# EAGLE board Tx_328p (EAGLE 7.2.0)
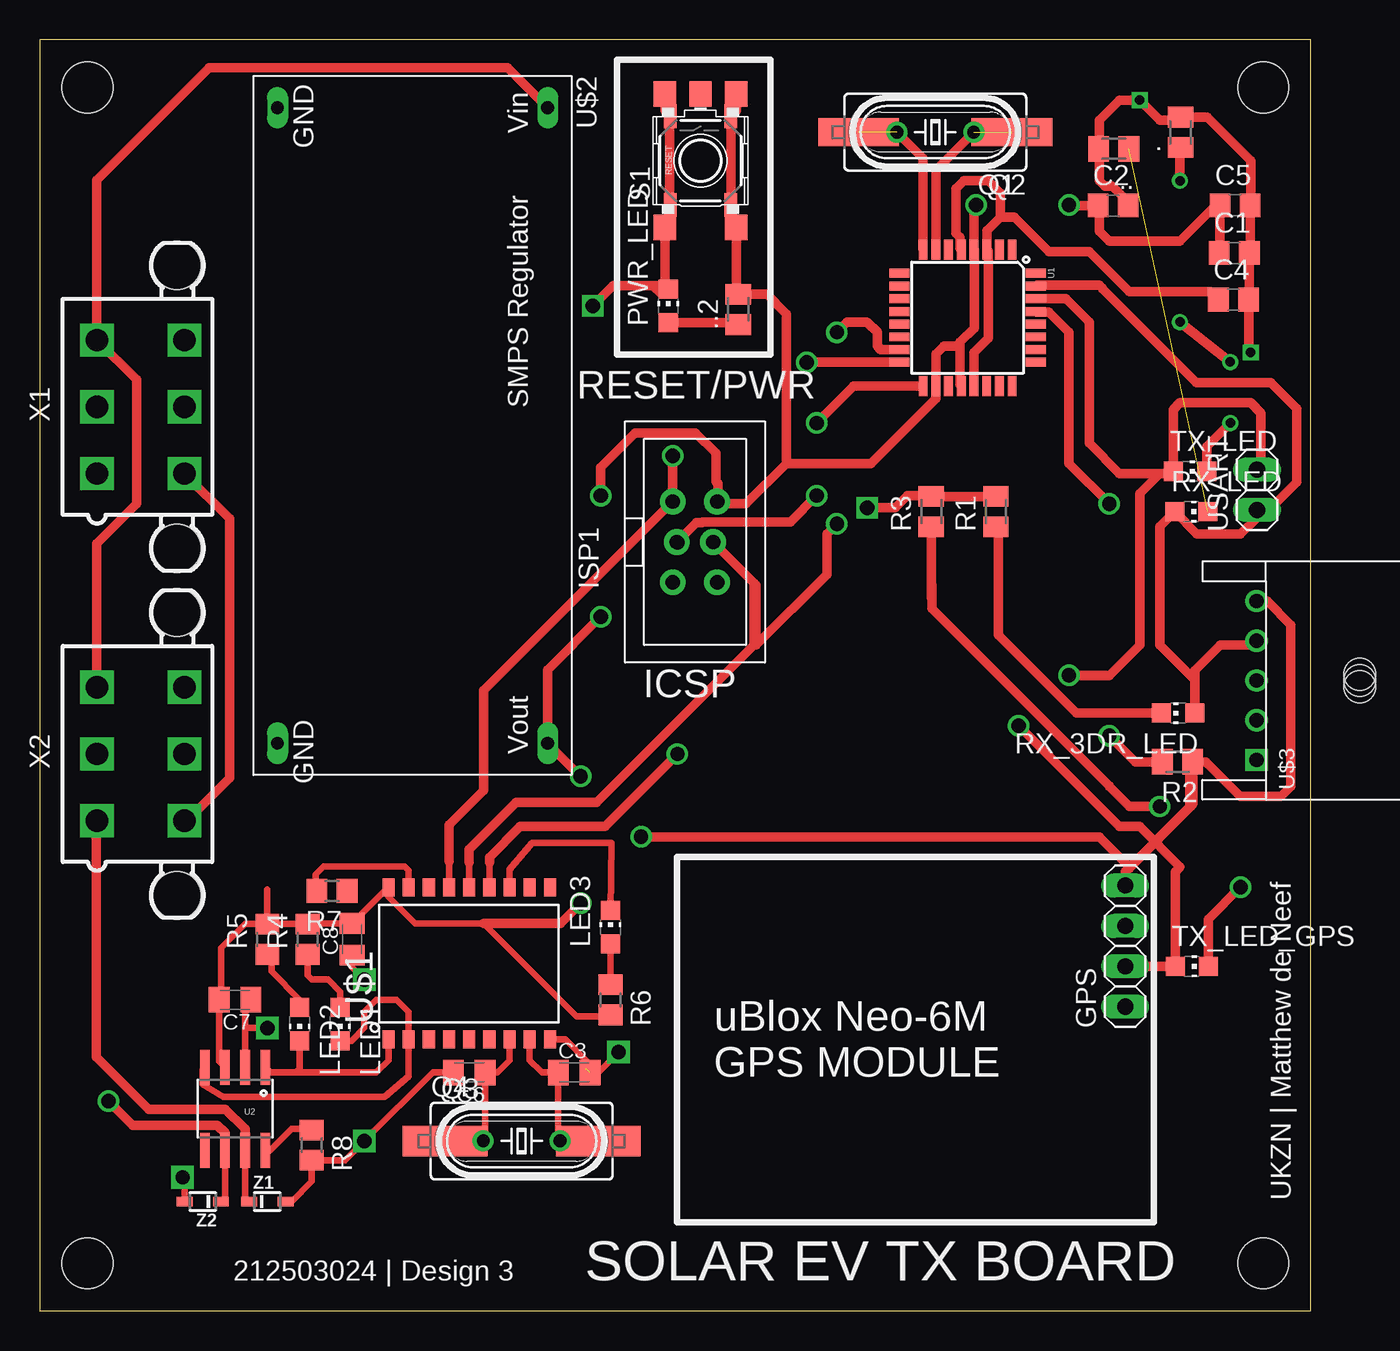
[diagram p0: board, top side]
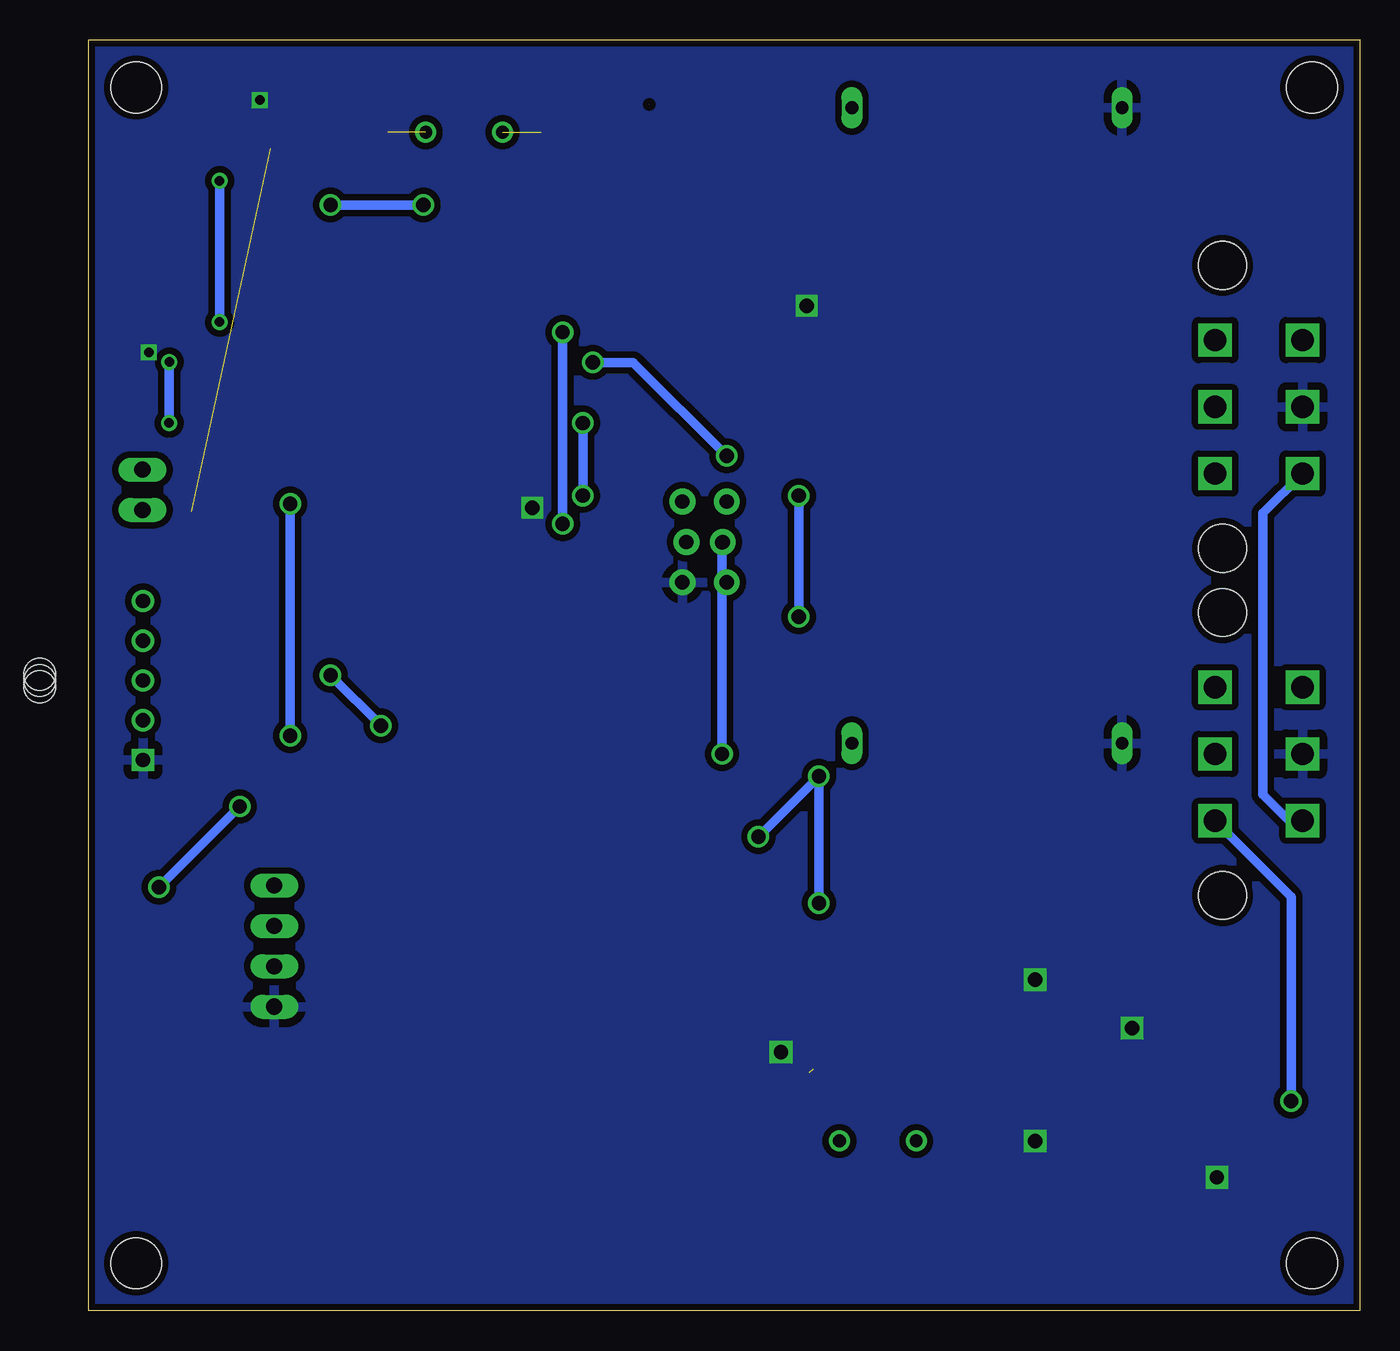
[diagram p1: board, bottom side, seen from below]

Size 80 x 80 mm. Coordinates in mm from the lower left corner, seen from the top.
Outline: 44.72,75.93 44.72,75.93
Outline: 0,0 80,0 80,80 0,80 0,0
Copper layers (1*16): Top 0.035mm / dielectric 1.5mm / Bottom 0.035mm
Design rules "Bens_PCB_SERVICE": minimum track width 16mil, minimum drill 24mil, track to track 10mil, track to pad 12mil, pad to pad 12mil, via to via 10mil, smd to smd 12mil, copper to edge 10mil, drill to drill 10mil, minimum pad ring 10mil, minimum via ring 8mil, stop-mask expansion 4mil, vias tented up to drill 0mil, thermal gap 20mil
Holes 3.2 mm at 3,3 77,3 77,77 3,77

## Footprints (pad centres in the part's own frame; a part is rotated, then mirrored left to right if it is on the bottom)
M0805 = smd 1.3 x 1.6: 1 -0.95,0; 2 0.95,0
C0805 = smd 1.3 x 1.5: 1 -0.95,0; 2 0.95,0
C0805K = smd 1.3 x 1.6: 1 -1,0; 2 1,0
1X04 = drill 1.016 long: 1 -3.81,0; 2 -1.27,0; 3 1.27,0; 4 3.81,0
AVRISP-BOX = drill 0.9 pad 1.626: 1 -1.397,2.54; 2 1.397,2.54; 3 -1.143,0; 4 1.143,0; 5 -1.397,-2.54; 6 1.397,-2.54
CHIP-LED0805 = smd 1.2 x 1.2: A 0,-1.05; C 0,1.05
HC49/S = drill 0.813: 1 -2.413,0; 2 2.413,0
SM49 = smd 5.08 x 1.778: 1 -4.826,0; 2 4.826,0
HC49UP = smd 5.334 x 1.93: 1 -4.826,0; 2 4.826,0
R0805 = smd 1.3 x 1.5: 1 -0.95,0; 2 0.95,0
TACTILE-SWITCH-SMD = smd 1.524 x 0.762: 1 -2.794,1.905; 2 2.794,1.905; 3 -2.794,-1.905; 4 2.794,-1.905
SKHMPXE010 = smd 1.6 x 1.4: 1 -4.2,2.25; 2 4.2,2.25; 3 -4.2,-2.25; 4 4.2,-2.25; 5 4.2,0
TQFP32-08 = smd 1.27 x 0.559: 1 -4.293,2.8; 2 -4.293,2; 3 -4.293,1.2; 4 -4.293,0.4; 5 -4.293,-0.4; 6 -4.293,-1.2; 7 -4.293,-2; 8 -4.293,-2.8; 17 4.293,-2.8; 18 4.293,-2; 19 4.293,-1.2; 20 4.293,-0.4; 21 4.293,0.4; 22 4.293,1.2; 23 4.293,2; 24 4.293,2.8 | smd 0.559 x 1.27: 9 -2.8,-4.293; 10 -2,-4.293; 11 -1.2,-4.293; 12 -0.4,-4.293; 13 0.4,-4.293; 14 1.2,-4.293; 15 2,-4.293; 16 2.8,-4.293; 25 2.8,4.293; 26 2,4.293; 27 1.2,4.293; 28 0.4,4.293; 29 -0.4,4.293; 30 -1.2,4.293; 31 -2,4.293; 32 -2.8,4.293
SO08 = smd 0.61 x 2.21: 1 -1.905,-2.616; 2 -0.635,-2.616; 3 0.635,-2.616; 4 1.905,-2.616; 5 1.905,2.616; 6 0.635,2.616; 7 -0.635,2.616; 8 -1.905,2.616
SO-18W = smd 0.762 x 1.143: 1 -5.08,-4.788; 2 -3.81,-4.788; 3 -2.54,-4.788; 4 -1.27,-4.788; 5 0,-4.788; 6 1.27,-4.788; 7 2.54,-4.788; 8 3.81,-4.788; 9 5.08,-4.788; 10 5.08,4.788; 11 3.81,4.788; 12 2.54,4.788; 13 1.27,4.788; 14 0,4.788; 15 -1.27,4.788; 16 -2.54,4.788; 17 -3.81,4.788; 18 -5.08,4.788
SMPSBOARD = drill 0.8 long: GND 2,1.5; GND@ 42,1.5; VIN 2,18.5; VOUT 42,18.5
1744426-5 = drill 0.9 square: P$1 -5,6.5 | drill 0.9: P$2 -2.5,6.5; P$3 0,6.5; P$4 2.5,6.5; P$5 5,6.5 | hole 2: 0,0; -0.4,0; 0.4,0
1X02 = drill 1.016 long: 1 -1.27,0; 2 1.27,0
5566-6 = drill 1.4 square: 1 4.2,-2.75; 2 0,-2.75; 3 -4.2,-2.75; 4 4.2,2.75; 5 0,2.75; 6 -4.2,2.75 | hole 3: 8.9,2.29; -8.9,2.29
SOD323 = smd 1 x 0.6: A 1.143,0; C -1.143,0

## Placement (x,y rotation side)
.  1k  [M0805]  71.8,74.17 90 top
..  1k  [M0805]  67.59,73.14 180 top
..2  1k  [M0805]  43.96,63.02 90 top
C1  0.1uF  [C0805]  75.17,66.58 0 top
C2  0.1uF  [C0805]  67.55,69.57 0 top
C3  22pF  [C0805K]  33.63,15.01 0 top
C4  0.1uF  [C0805]  75.12,63.63 0 top
C5  0.1uF  [C0805]  75.22,69.57 0 top
C6  22pF  [C0805K]  27.03,15.01 180 top
C7  100nF  [C0805K]  12.29,19.58 180 top
C8  100nF  [C0805K]  19.66,23.39 90 top
GPS  [1X04]  68.31,22.96 90 top
ISP1  AVRISP-BOX  [AVRISP-BOX]  41.23,48.39 0 top
LED1  RX  [CHIP-LED0805]  18.9,18.06 180 top
LED2  TX  [CHIP-LED0805]  16.36,18.06 180 top
LED3  INT  [CHIP-LED0805]  35.92,24.16 0 top
PWR_LED  [CHIP-LED0805]  39.55,63.25 0 top
Q1  [HC49/S]  56.36,74.18 180 top
Q2  [SM49]  56.36,74.18 180 top
Q3  16MHz  [HC49/S]  30.33,10.69 0 top
Q4  16MHz  [HC49UP]  30.33,10.69 0 top
R1  1k  [M0805]  60.17,50.31 90 top
R2  50k  [M0805]  71.6,34.56 180 top
R3  1k  [M0805]  56.11,50.31 90 top
R4  1k  [R0805]  16.87,23.39 90 top
R5  1k  [R0805]  14.33,23.39 90 top
R6  1k  [R0805]  35.92,19.58 270 top
R7  100k  [R0805]  18.39,26.44 180 top
R8  100k  [R0805]  17.12,10.44 270 top
RESET  TAC_SWITCHSMD  [TACTILE-SWITCH-SMD]  41.58,72.39 90 top
RX_3DR_LED  [CHIP-LED0805]  71.64,37.62 90 top
RX_LED  [CHIP-LED0805]  72.47,50.3 270 top
S1  SKHMPSE010  [SKHMPXE010]  41.58,72.39 90 top
TX_LED  [CHIP-LED0805]  72.39,52.84 270 top
TX_LED_GPS  [CHIP-LED0805]  72.5,21.69 270 top
U1  ATMEGA328P_TQFP  [TQFP32-08]  58.39,62.5 270 top
U2  MCP2551  [SO08]  12.29,12.73 180 top
U$1  MCP2515SO  [SO-18W]  27.03,21.87 0 top
U$2  SMPSBOARD  [SMPSBOARD]  13.46,77.72 270 top
U$3  HEADER-5WAY  [1744426-5]  83.07,39.67 90 top
USART  [1X02]  76.61,51.67 90 top
X1  5566-6  [5566-6]  6.35,56.9 270 top
X2  5566-6  [5566-6]  6.35,35.05 270 top
Z1  TVS-UD-SOD323  [SOD323]  14.33,6.88 0 top
Z2  TVS-UD-SOD323  [SOD323]  10.26,6.88 180 top

## Library data of the parts
. .. ..2 R1 R3 = rcl
C1-C8 R2 R4-R8 = resistor
GPS USART = pinhead
ISP1 = adafruit
LED1-LED3 PWR_LED RX_3DR_LED RX_LED TX_LED TX_LED_GPS = led
Q1 Q3 = crystal; OC_FARNELL: 1667008; OC_NEWARK: unknown
Q2 Q4 = crystal; OC_FARNELL: unknown; OC_NEWARK: unknown
RESET = SparkFun-Retired; PROD_ID: SWCH-08247
S1 = switch
U1 = SparkFun-DigitalIC; PROD_ID: IC-09069
U2 = SparkFun
U$1 U$2 = RobThePyro
U$3 = con-TE-EP
X1 X2 = con-molex; MPN: 95566-61002; OC_FARNELL: unknown; OC_NEWARK: 22K8620
Z1 Z2 = supressor

## Nets
+5V: R7.1
CANCS: U$1.16
CANH: U2.7 X1.1 X2.1 Z1.C
CANINT: LED3.C U$1.12
CANL: U2.6 X1.4 X2.4 Z2.C
CANRST: R7.2 U$1.17
CANSTBY: R8.1 U2.8
GND: ..2 ...2 C1.2 C2.2 C3.2 C4.2 C5.2 C6.2 C7.1 C8.1 GPS.1 ISP1.6 PWR_LED.C R1.2 R3.2 R8.2 RESET.1 RESET.2 S1.1 S1.2 U2.2 U$1.9 U$2.GND U$2.GND@ U$3.P$1 X1.2 X2.2 Z1.A Z2.A
MISO: ISP1.1 U1.16 U$1.15
MOSI: ISP1.4 U1.15 U$1.14
N$1: Q1.1 Q2.1 U1.7
N$2: Q1.2 Q2.2 U1.8
N$3: R2.2 U1.29
N$4: R3.1 TX_LED_GPS.C
N$5: R1.1 RX_3DR_LED.C
N$6: ...1 RX_LED.C
N$7: ..2.1 PWR_LED.A
N$8: ..1 TX_LED.C
N$9: C4.1 U1.3 U1.5 U1.21
N$10: LED1.A R4.1
N$11: LED2.A R5.1
N$12: LED3.A R6.1
N$13: C3.1 Q3.2 Q4.2 U$1.8
N$14: C6.1 Q3.1 Q4.1 U$1.7
N$20: X1.5
N$21: X1.6
N$26: X2.5
N$27: X2.6
RST: ISP1.5
RX0: GPS.2 TX_LED.A TX_LED_GPS.A U1.30 USART.2
RXCAN: LED1.C U2.4 U$1.2
SCK: ISP1.3 U1.17 U$1.13
TX0: RX_3DR_LED.A RX_LED.A U1.31 U$3.P$4 USART.1
TXCAN: LED2.C U2.1 U$1.1
VCC: ..2.2 C1.1 C2.1 C5.1 C7.2 C8.2 GPS.4 ISP1.2 R2.1 R4.2 R5.2 R6.2 RESET.3 RESET.4 S1.3 S1.4 U1.4 U1.18 U1.20 U2.3 U$1.18 U$2.VOUT U$3.P$5
VIN: U$2.VIN X1.3 X2.3

## Tracks (layer width: path | path; a pad name or v marks a point on that pad's centre or on a via)
+5V
  Top 0.406: 19.66,26.12 R7.1
CANH
  Top 0.406: U2.7 12.93,7.14 Z1.C
  Top 0.61: U2.7 12.93,11.46 11.68,12.7 6.86,12.7 3.56,16 3.56,30.81 X2.1
  Bottom 0.61: X2.1 4.44,30.85 6.1,32.51 6.1,50.2 X1.1
CANINT
  Top 0.406: U$1.12 29.57,27.79 30.99,29.46 35.98,29.46 LED3.C
CANL  (via drill 0.9 pad 0.61)
  Top 0.406: U2.6 11.66,7.14 Z2.C
  Top 0.61: U2.6 11.66,11.2 11.18,11.68 5.84,11.68 v4.32,13.21 | X2.4 9.26,30.85 11.94,33.53 11.94,49.86 X1.4
  Bottom 0.61: v4.32,13.21 4.32,26.07 X2.4
CANRST
  Top 0.406: U$1.17 23.22,27.71 22.96,27.96 17.88,27.96 17.37,27.46 17.37,26.51 R7.2
CANSTBY
  Top 0.406: U2.8 14.5,10.11 15.85,11.46 17.05,11.46 R8.1
GND  (via drill 0.6, 0.9 pad 0.61, 0.9 pad 1.42)  (1 unrouted)
  Top 0.406: U2.2 12.93,17.8 | 12.93,17.8 12.93,19.22 C7.1 | U$1.9 33.08,17.08 34.39,15.77 34.39,15.25 | Z1.A 15.85,6.88 17.12,8.15 R8.2 19.22,9.49 v20.42,10.69 24.74,15.01 C6.2 | C8.1 19.66,21.61 v20.42,20.85 | v14.33,17.8 12.93,17.8 | Z2.A 9.12,8.28 v8.99,8.41 | C3.2 35.15,15.01 v36.42,16.28
  Top 0.61: S1.2 39.33,75.53 RESET.2 39.68,74.73 39.62,74.68 39.62,69.65 RESET.1 39.68,68.53 S1.1 39.33,64.51 | 39.33,64.51 PWR_LED.C 39.55,64.08 39.62,64.01 39.12,64.01 38.61,64.52 36.07,64.52 v34.8,63.25 36.07,64.51 39.33,64.51 | v52.07,50.55 53.85,50.55 54.61,51.31 56.06,51.31 R3.2 R1.2 | v76.2,60.33 76.07,60.45 C4.2 76.12,63.68 C1.2 76.17,66.63 C5.2 76.2,69.6 76.2,72.39 73.47,75.12 ..2 | 71.75,74.93 70.48,74.93 v69.22,76.2 67.94,76.2 66.67,74.93 66.67,73.17 ...2 66.67,73.1 66.67,71.12 67.03,70.77 67.5,70.77 68.5,69.77 C2.2
  pour Bottom (isolate 0.406): 0,0 79.9,0 79.9,80.01 0,80.01
MISO  (via drill 0.9 pad 0.61)
  Top 0.406: U$1.15 25.76,28.3
  Top 0.61: 25.76,28.3 25.76,30.58 27.94,32.77 27.94,39.04 ISP1.1 v39.84,53.81 | v48.26,59.69 v48.27,59.7 U1.16
  Bottom 0.61: v39.84,53.81 45.72,59.69 v48.26,59.69
MOSI  (via drill 0.9 pad 0.61)
  Top 0.406: U$1.14 27.03,28.22
  Top 0.61: 27.03,28.22 27.03,29.06 29.97,32 35.05,32 44.96,41.91 44.96,45.81 ISP1.4 45.09,45.69 45.09,41.91 49.53,46.35 49.53,48.9 v50.16,49.53 | v50.16,61.59 50.8,62.23 52.07,62.23 52.7,61.59 52.7,60.73 52.92,60.51 U1.15
  Bottom 0.61: v50.16,49.53 v50.16,61.59
N$1  (1 unrouted)
  Top 0.61: U1.7 56.39,71.8 Q1.1
N$2  (1 unrouted)
  Top 0.61: Q1.2 55.59,72.54 U1.8
N$3  (via drill 0.9 pad 0.61)
  Top 0.61: R2.2 68.94,34.56 v67.31,36.2 | v67.31,50.8 64.77,53.34 64.77,61.59 63.5,62.87 62.72,62.87 U1.29
  Bottom 0.61: v67.31,36.2 v67.31,50.8
N$4  (via drill 0.9 pad 0.61)
  Top 0.61: TX_LED_GPS.C 73.55,24.66 v75.56,26.67 | 56.11,44.86 56.11,45.72 | 56.11,45.72 R3.1 | v70.48,31.75 68.58,31.75 67.31,33.02 67.31,33.05 56.15,44.2 56.15,45.67 56.11,45.72
  Bottom 0.61: v75.56,26.67 v70.48,31.75
N$5
  Top 0.61: RX_3DR_LED.C 65.25,37.62 60.33,42.55 60.33,49.2 R1.1
N$6  (1 unrouted)
N$7
  Top 0.61: PWR_LED.A 43.84,62.2 ..2.1
N$8  (via drill 0.6)
  Top 0.61: TX_LED.C 73.44,54.39 v74.93,55.88 | v74.91,59.72 v71.75,62.23 | ..1 71.75,73.18 v71.75,71.12
  Bottom 0.61: v74.93,55.88 v74.91,59.72 | v71.75,62.23 v71.75,71.12
N$9
  Top 0.61: U1.21 58.79,60.32 59.69,61.21 59.69,66.69 U1.3 59.59,67.97 60.45,68.83 | 60.45,68.83 60.45,70.36 59.69,71.12 58.17,71.12 57.66,70.61 57.66,67.82 57.91,67.56 57.91,66.87 U1.5 | C4.1 73.67,64.14 68.58,64.14 66.04,66.67 63.5,66.67 61.34,68.83 60.45,68.83
N$10
  Top 0.406: LED1.A 18.9,20.09 18.14,20.85 17.12,20.85 16.87,21.11 R4.1
N$11
  Top 0.406: LED2.A 16.36,19.58 14.58,21.36 14.58,22.19 R5.1
N$12
  Top 0.406: LED3.A R6.1
N$13
  Top 0.406: Q4.2 Q3.2 32.63,10.69 C3.1 31.6,15.01 30.84,15.77 U$1.8
N$14
  Top 0.406: Q4.1 Q3.1 28.03,10.69 C6.1 28.8,15.01 29.57,15.77 U$1.7
RX0  (via drill 0.9 pad 0.61)
  Top 0.61: GPS.2 TX_LED_GPS.A 71.45,27.64 71.75,27.94 69.22,30.48 67.94,30.48 v61.59,36.83 | 70.48,52.7 69.22,51.44 69.22,41.91 67.31,40.01 v64.77,40.01 | 70.48,52.7 71.2,52.7 TX_LED.A 71.34,56.73 71.75,57.15 76.2,57.15 76.83,56.52 76.83,53.17 USART.2 | 70.48,52.7 67.94,52.7 66.04,54.61 66.04,62.23 64.57,63.7 U1.30
  Bottom 0.61: v61.59,36.83 v64.77,40.01
RXCAN
  Top 0.406: LED1.C 19.63,17.01 20.42,17.8 20.42,18.82 21.18,19.58 22.45,19.58 23.22,18.82 U$1.2 23.22,14.76 21.69,13.49 11.53,13.49 10.26,14.25 10.26,15.21 U2.4
SCK  (via drill 0.9 pad 0.61)
  Top 0.406: U$1.13 28.3,28.22
  Top 0.61: 28.3,28.22 28.3,28.55 30.23,30.48 35.56,30.48 v40.13,35.05 | v40.13,48.35 ISP1.3 41.33,49.63 41.7,49.63 41.72,49.65 47.23,49.65 v48.9,51.31 | U1.17 51.22,58.21 v48.9,55.88
  Bottom 0.61: v40.13,35.05 v40.13,48.35 | v48.9,55.88 v48.9,51.31
TX0
  Top 0.61: 73,37.31 RX_3DR_LED.A 72.69,39.7 | 72.69,39.7 70.48,41.91 70.48,49.37 RX_LED.A 72.83,48.9 75.56,48.9 76.61,49.94 USART.1 77.34,50.4 79.1,52.17 79.1,56.79 77.47,58.42 72.8,58.42 66.87,64.34 66.87,64.38 66.69,64.56 62.75,64.56 U1.31 62.69,64.49 | 72.69,39.7 72.69,40.31 74.3,41.91 76.31,41.91 U$3.P$4
TXCAN
  Top 0.406: U$1.1 21.95,15.77 21.18,15.01 16.1,15.01 | 16.1,15.01 14.53,15.01 U2.1 | LED2.C 16.36,15.27 16.1,15.01
VCC  (via drill 0.9 pad 0.61)
  Top 0.406: U2.3 11.29,15.71 C7.2 11.43,19.72 11.43,22.86 12.91,24.34 R5.2 | R5.2 R4.2 16.92,24.39 C8.2 21.92,26.66 U$1.18 21.95,26.06 23.62,24.38 27.94,24.38 33.78,18.54 35.82,18.54 R6.2 | 14.33,26.52 R5.2
  Top 0.61: S1.4 43.83,75.53 RESET.4 RESET.3 43.49,68.53 S1.3 43.83,64.1 ..2.2 45.75,63.97 46.99,62.74 46.99,53.34 | 46.99,53.34 44.45,50.8 42.76,50.8 ISP1.2 42.67,50.98 42.67,52.07 42.55,52.2 42.55,53.98 41.27,55.24 37.47,55.24 35.31,53.09 v35.31,51.31 | 57.91,60.71 57.91,60.96 58.8,61.85 58.8,66.79 U1.4 58.79,69.46 v58.93,69.6 | 57.91,60.71 57.91,58.29 U1.20 | 57.91,60.71 56.9,60.71 56.39,60.2 U1.18 56.39,57.4 52.32,53.34 46.99,53.34 | v64.77,69.6 64.8,69.57 C2.1 66.67,69.49 66.67,67.94 67.31,67.31 71.75,67.31 74.02,69.57 C5.1 74.27,66.63 C1.1 | v35.31,43.69 31.96,40.34 U$2.VOUT v34.04,33.65 | 27.94,24.38 32.77,24.38 v34.04,25.65 | GPS.4 68.31,27.67 72.39,31.75 | 72.39,31.77 72.39,34.4 R2.1 | R2.1 72.55,31.91 72.39,31.75 | 72.39,31.75 72.39,31.77 | 72.39,31.77 72.44,31.82 72.44,31.73 68.56,27.85 68.56,27.96 66.67,29.84 v37.84,29.84 | R2.1 73.39,34.56 75.56,32.38 78.11,32.38 78.74,33.02 78.74,43.18 77.25,44.67 U$3.P$5
  Bottom 0.61: v35.31,43.69 v35.31,51.31 | v34.04,25.65 v34.04,33.65 v37.84,29.84 | v58.93,69.6 v64.77,69.6
VIN
  Top 0.61: X2.3 3.6,48.3 6.1,50.8 6.1,58.6 X1.3 3.6,71.16 10.67,78.23 29.45,78.23 U$2.VIN

## Text on the board
tPlace: RESET/PWR | ICSP | uBlox Neo-6M / GPS MODULE | UKZN | Matthew de Neef | 212503024 | Design 3 | SOLAR EV TX BOARD